# EAGLE board COMP_PULSE-SIEM_V2_02 (EAGLE 9.5.1)
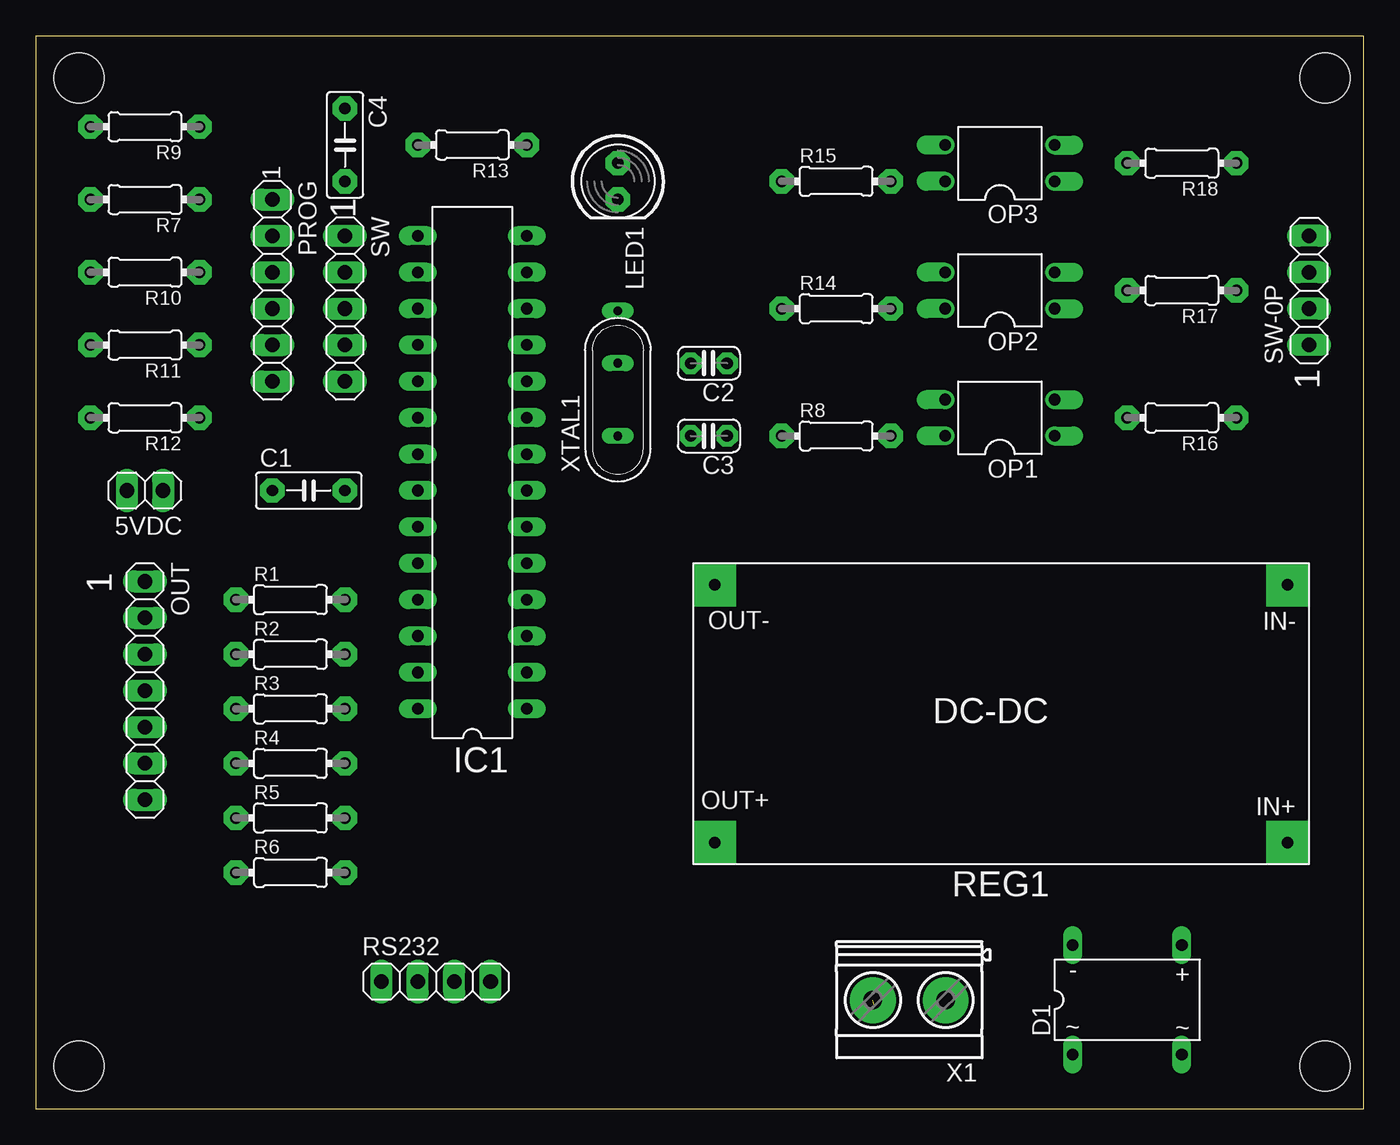
[diagram p0: board, top side]
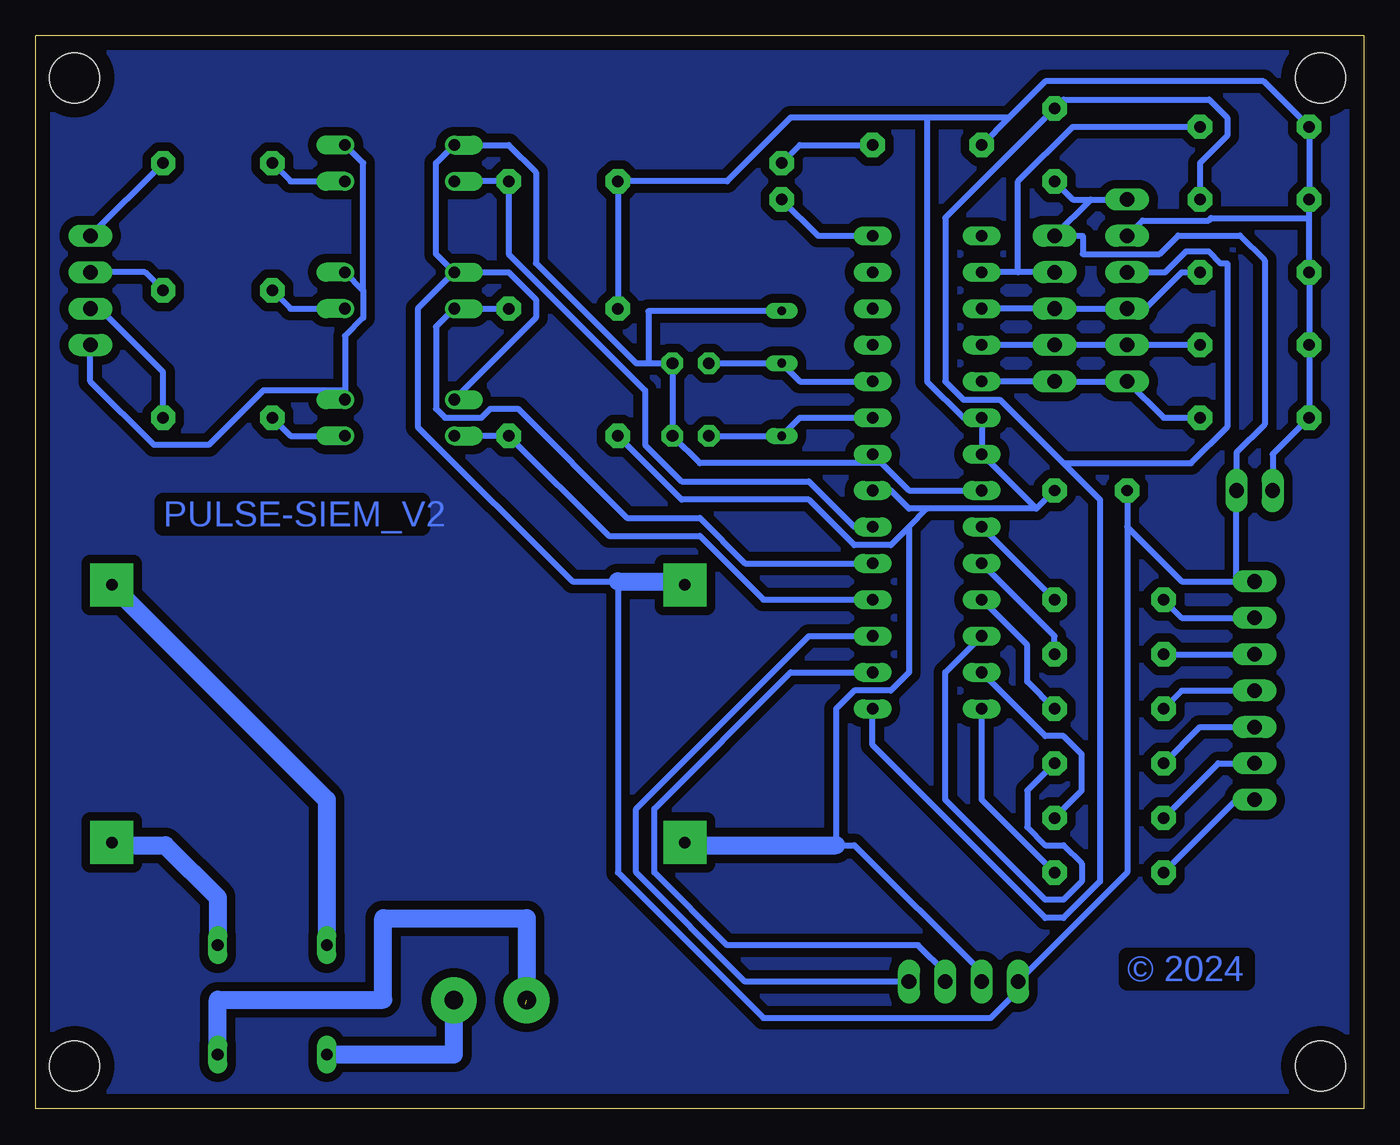
[diagram p1: board, bottom side, seen from below]

Size 92.71 x 74.93 mm. Coordinates in mm from the lower left corner, seen from the top.
Outline: 0.01,74.6 0.01,0 92.71,0 92.71,74.93 0,74.93 0,73.66
Copper layers (1*16): Top 0.035mm / dielectric 1.5mm / Bottom 0.035mm
Design rules "default *": minimum track width 16mil, minimum drill 0.35mm, track to track 16mil, track to pad 16mil, pad to pad 16mil, via to via 16mil, smd to smd 16mil, copper to edge 40mil, drill to drill 16mil, minimum pad ring 10mil, minimum via ring 8mil, stop-mask expansion 4mil, vias tented up to drill 0mil, thermal gap 16mil
Holes 3.5 mm at 3,72 90,72 90,3 3,3

## Footprints (pad centres in the part's own frame; a part is rotated, then mirrored left to right if it is on the bottom)
1X02 = drill 1.016 long: 1 -1.27,0; 2 1.27,0
C050-025X075 = drill 0.8 pad 1.7 octagon: 1 -2.54,0; 2 2.54,0
C25-024X044 = drill 0.813 pad 1.5 octagon: 1 -1.27,0; 2 1.27,0
S1WBS80 = drill 0.813 long: + 3.81,3.81; - -3.81,3.81; ~ -3.81,-3.81; ~~ 3.81,-3.81
DIL28-3 = drill 0.813 long: 1 -16.51,-3.81; 2 -13.97,-3.81; 3 -11.43,-3.81; 4 -8.89,-3.81; 5 -6.35,-3.81; 6 -3.81,-3.81; 7 -1.27,-3.81; 8 1.27,-3.81; 9 3.81,-3.81; 10 6.35,-3.81; 11 8.89,-3.81; 12 11.43,-3.81; 13 13.97,-3.81; 14 16.51,-3.81; 15 16.51,3.81; 16 13.97,3.81; 17 11.43,3.81; 18 8.89,3.81; 19 6.35,3.81; 20 3.81,3.81; 21 1.27,3.81; 22 -1.27,3.81; 23 -3.81,3.81; 24 -6.35,3.81; 25 -8.89,3.81; 26 -11.43,3.81; 27 -13.97,3.81; 28 -16.51,3.81
LED_5MM = drill 0.8 pad 1.7 octagon: A -1.27,0; K 1.27,0
DIL04 = drill 0.813 offset: 1 -1.27,-3.81; 2 1.27,-3.81; 3 1.27,3.81; 4 -1.27,3.81
1X07 = drill 1.016 long: 1 -7.62,0; 2 -5.08,0; 3 -2.54,0; 4 0,0; 5 2.54,0; 6 5.08,0; 7 7.62,0
ICSP-AVR-6-PIN = drill 1.016 long: 1 -6.35,0; 2 -3.81,0; 3 -1.27,0; 4 1.27,0; 5 3.81,0; 6 6.35,0
RESISTOR_1/4_7.5 = drill 0.8 pad 1.7 octagon: 1 -3.81,0; 2 3.81,0
LM2596_DC-DC_HW-411 = drill 0.813 pad 3 square: 1 1.5,19.5; 2 1.5,1.5; 3 41.5,19.5; 4 41.5,1.5
1X04 = drill 1.016 long: 1 -3.81,0; 2 -1.27,0; 3 1.27,0; 4 3.81,0
1X05 = drill 1.016 long: 1 -5.08,0; 2 -2.54,0; 3 0,0; 4 2.54,0; 5 5.08,0
MKDSN1,5/2-5,08 = drill 1.3 pad 3.2: 1 -2.561,0.025; 2 2.519,0.025
QS = drill 0.61 long: 1 -2.54,0; 2 2.54,0; GND 6.2,0

## Placement (x,y rotation side)
5VDC  [1X02]  7.62,43.18 180 top
C1  100nf  [C050-025X075]  19.05,43.18 0 top
C2  22pf  [C25-024X044]  46.99,52.07 180 top
C3  22pf  [C25-024X044]  46.99,46.99 180 top
C4  10nf  [C050-025X075]  21.59,67.31 270 top
D1  [S1WBS80]  76.2,7.62 0 top
IC1  ATMEGA328P  [DIL28-3]  30.48,44.45 90 top
LED1  [LED_5MM]  40.64,64.77 270 top
OP1  PC817  [DIL04]  67.31,48.26 90 top
OP2  PC817  [DIL04]  67.31,57.15 90 top
OP3  PC817  [DIL04]  67.31,66.04 90 top
OUT  [1X07]  7.62,29.21 270 top
PROG  [ICSP-AVR-6-PIN]  16.51,57.15 270 top
R1  220R  [RESISTOR_1/4_7.5]  17.78,35.56 0 top
R2  220R  [RESISTOR_1/4_7.5]  17.78,31.75 0 top
R3  220R  [RESISTOR_1/4_7.5]  17.78,27.94 0 top
R4  220R  [RESISTOR_1/4_7.5]  17.78,24.13 0 top
R5  220R  [RESISTOR_1/4_7.5]  17.78,20.32 0 top
R6  220R  [RESISTOR_1/4_7.5]  17.78,16.51 0 top
R7  10K  [RESISTOR_1/4_7.5]  7.62,63.5 180 top
R8  10K  [RESISTOR_1/4_7.5]  55.88,46.99 0 top
R9  10K  [RESISTOR_1/4_7.5]  7.62,68.58 180 top
R10  10K  [RESISTOR_1/4_7.5]  7.62,58.42 180 top
R11  10K  [RESISTOR_1/4_7.5]  7.62,53.34 180 top
R12  10K  [RESISTOR_1/4_7.5]  7.62,48.26 180 top
R13  1K  [RESISTOR_1/4_7.5]  30.48,67.31 180 top
R14  10K  [RESISTOR_1/4_7.5]  55.88,55.88 0 top
R15  10K  [RESISTOR_1/4_7.5]  55.88,64.77 0 top
R16  220R  [RESISTOR_1/4_7.5]  80.01,48.26 180 top
R17  220R  [RESISTOR_1/4_7.5]  80.01,57.15 180 top
R18  220R  [RESISTOR_1/4_7.5]  80.01,66.04 180 top
REG1  [LM2596_DC-DC_HW-411]  88.9,38.1 180 top
RS232  [1X04]  27.94,8.89 0 top
SW  [1X05]  21.59,55.88 270 top
SW-0P  [1X04]  88.9,57.15 90 top
X1  24VDC  [MKDSN1,5/2-5,08]  60.96,7.62 180 top
XTAL1  20MHZ  [QS]  40.64,49.53 90 top

## Library data of the parts
5VDC OUT RS232 SW SW-0P = pinhead
C1-C4 D1 LED1 PROG R1-R18 REG1 X1 XTAL1 = 00-tecnicosotv
IC1 = atmega8
OP1-OP3 = optocoupler; MPN: PC817X4J000F; OC_FARNELL: 9707727; OC_NEWARK: 97K7059

## Nets
1L1+: OUT.2 R1.1
1L1-: OUT.3 R2.1
1L2+: OUT.4 R3.1
1L2-: OUT.5 R4.1
1L3+: OUT.6 R5.1
1L3-: OUT.7 R6.1
+5V: 5VDC.2 C1.2 IC1.7 IC1.20 IC1.21 PROG.2 R7.2 R8.1 R9.2 R10.2 R11.2 R12.2 R13.2 R14.1 R15.1 REG1.3 RS232.2
GND: 5VDC.1 C1.1 C2.1 C3.1 C4.2 IC1.8 IC1.22 OP1.3 OP2.3 OP3.3 OUT.1 PROG.1 REG1.4 RS232.1 SW.1
GND.: OP1.2 OP2.2 OP3.2 SW-0P.1
N$1: IC1.4 OP1.4 R8.2
N$2: IC1.5 OP2.4 R14.2
N$3: IC1.6 OP3.4 R15.2
N$4: OP1.1 R16.2
N$5: OP2.1 R17.2
N$6: OP3.1 R18.2
N$9: C2.2 IC1.10 XTAL1.2
N$10: C4.1 IC1.1 PROG.3 R7.1
N$12: C3.2 IC1.9 XTAL1.1
N$17: IC1.23 R1.2
N$18: IC1.24 R2.2
N$19: IC1.25 R3.2
N$20: IC1.26 R4.2
N$21: IC1.27 R5.2
N$22: IC1.28 R6.2
N$26: IC1.14 LED1.K
N$27: LED1.A R13.1
N$33: D1.~ X1.1
N$34: D1.~~ X1.2
N$35: D1.- REG1.2
N$36: D1.+ REG1.1
RX: IC1.2 RS232.3
S1: IC1.16 R9.1 SW.2
S2: IC1.17 PROG.4 R10.1 SW.3
S3: IC1.18 PROG.5 R11.1 SW.4
S4: IC1.19 PROG.6 R12.1 SW.5
SW1: R16.1 SW-0P.2
SW2: R17.1 SW-0P.3
SW3: R18.1 SW-0P.4
TX: IC1.3 RS232.4

## Tracks (layer width: path | path; a pad name or v marks a point on that pad's centre or on a via)
1L1+
  Bottom 0.406: OUT.2 12.7,34.29 R1.1
1L1-
  Bottom 0.406: R2.1 OUT.3
1L2+
  Bottom 0.406: OUT.4 12.7,29.21 R3.1
1L2-
  Bottom 0.406: OUT.5 11.43,26.67 R4.1
1L3+
  Bottom 0.406: OUT.6 10.16,24.13 R5.1
1L3-
  Bottom 0.406: OUT.7 8.89,21.59 R6.1
+5V
  Bottom 0.406: RS232.2 26.67,9.53 35.56,18.41 36.83,18.41 36.83,27.94 35.56,29.21 33.02,29.21 31.75,30.48 31.75,40.64 | 46.99,18.41 REG1.3 | IC1.7 33.02,43.18 31.75,41.91 30.48,41.91 | 22.86,41.91 30.48,41.91 | C1.2 22.86,41.91 | R8.1 47.62,42.55 38.73,42.55 35.56,39.37 33.02,39.37 31.75,40.64 | 30.48,41.91 31.75,40.64 | 22.86,41.91 IC1.21 IC1.20 27.94,48.26 30.48,50.8 30.48,69.22 | 5VDC.2 6.35,45.72 R12.2 R11.2 R10.2 3.81,62.2 | R14.1 R15.1 44.45,64.77 40.01,69.22 30.48,69.22 | 24.77,69.22 22.23,71.75 6.99,71.75 R9.2 R7.2 3.81,62.2 | 24.77,69.22 R13.2 | 24.77,69.22 30.48,69.22 | 3.81,62.2 10.66,62.2 10.82,62.04 15.43,62.04 PROG.2
  Bottom 1.27: 46.99,18.41 36.83,18.41
ABCDE
  pour Bottom (isolate 0.61): 0,0 0,74.93 92.71,74.93 92.71,0
GND
  Bottom 0.406: C1.1 16.51,40.64 | 16.51,40.64 16.51,16.51 RS232.1 24.13,8.26 26.04,6.35 41.91,6.35 52.07,16.51 52.07,36.83 55.24,36.83 66.04,47.62 66.04,55.88 OP2.3 | 8.89,36.83 12.7,36.83 16.51,40.64 | 8.89,36.83 8.89,42.98 5VDC.1 8.89,45.82 6.91,47.8 6.91,59.26 8.64,60.98 12.95,60.98 14.25,59.69 19.61,59.69 19.61,60.96 SW.1 19.05,63.5 | 8.89,36.83 OUT.1 | IC1.22 31.75,43.18 33.66,45.09 | 33.66,45.09 46.35,45.09 C3.1 C2.1 50.8,52.07 57.78,59.05 57.78,65.41 59.69,67.31 OP3.3 64.77,66.04 64.77,59.69 OP2.3 | 33.66,45.09 IC1.8 | OP1.3 57.78,55.24 57.78,56.52 59.69,58.42 OP2.3 | 47.62,36.83 REG1.4 | 19.05,63.5 20.32,63.5 C4.2 | 19.05,63.5 PROG.1
  Bottom 1.27: 52.07,36.83 47.62,36.83
GND.
  Bottom 0.406: 71.12,50.16 71.12,53.98 69.85,55.24 69.85,57.15 | OP2.2 69.85,57.15 | OP3.2 69.85,66.04 69.85,57.15 | SW-0P.1 88.9,50.8 84.45,46.35 80.64,46.35 76.83,50.16 71.12,50.16 | 71.12,50.16 OP1.2
N$1
  Bottom 0.406: IC1.4 41.91,35.56 46.35,40.01 52.7,40.01 R8.2 OP1.4
N$2
  Bottom 0.406: IC1.5 43.18,38.1 46.35,41.27 51.44,41.27 59.05,48.9 60.96,48.9 61.59,48.26 64.14,48.26 64.77,48.9 64.77,54.61 OP2.4 R14.2
N$3
  Bottom 0.406: IC1.6 35.56,40.64 38.73,43.81 47.62,43.81 50.16,46.35 50.16,50.16 59.69,59.69 R15.2 OP3.4
N$4
  Bottom 0.406: OP1.1 74.93,46.99 R16.2
N$5
  Bottom 0.406: OP2.1 74.93,55.88 R17.2
N$6
  Bottom 0.406: OP3.1 74.93,64.77 R18.2
N$9
  Bottom 0.406: C2.2 XTAL1.2 39.37,50.8 IC1.10
N$10
  Bottom 0.406: IC1.1 34.29,25.4 22.23,13.34 20.95,13.34 18.41,15.88 18.41,42.55 20.95,45.09 | 20.95,45.09 25.4,49.53 27.94,49.53 29.21,50.8 29.21,62.23 C4.1 20.95,70.48 10.79,70.48 9.53,69.22 9.53,67.94 11.43,66.04 R7.1 | 20.95,45.09 12.06,45.09 9.53,47.62 9.53,59.05 10,59.05 10.82,59.88 12.39,59.88 13.85,58.42 PROG.3
N$12
  Bottom 0.406: C3.2 XTAL1.1 39.37,48.26 IC1.9
N$17
  Bottom 0.406: R1.2 IC1.23
N$18
  Bottom 0.406: IC1.24 21.59,33.02 R2.2
N$19
  Bottom 0.406: IC1.25 23.5,32.38 23.5,29.84 R3.2
N$20
  Bottom 0.406: IC1.26 29.21,30.48 29.21,21.59 22.23,14.61 20.95,14.61 19.68,15.88 19.68,17.14 20.95,18.41 22.23,18.41 23.5,19.68 23.5,22.23 R4.2
N$21
  Bottom 0.406: IC1.27 22.23,26.04 20.95,26.04 19.68,24.77 19.68,22.23 R5.2
N$22
  Bottom 0.406: IC1.28 26.67,21.59 R6.2
N$26
  Bottom 0.406: IC1.14 38.1,60.96 LED1.K
N$27
  Bottom 0.406: R13.1 39.37,67.31 LED1.A
N$33
  Bottom 1.27: D1.~ 63.52,3.81 X1.1
N$34  (1 unrouted)
  Bottom 1.27: D1.~~ 80.01,7.62 68.45,7.62 68.45,13.31 58.45,13.31 58.45,7.11 58.52,7.11 58.52,7.32
N$35
  Bottom 1.27: REG1.2 72.39,21.59 D1.-
N$36
  Bottom 0.406: REG1.1 87,18.41
  Bottom 1.27: 87,18.41 83.67,18.41 80.01,14.76 D1.+
RX
  Bottom 0.406: IC1.2 40.01,30.48 49.53,20.95 49.53,16.51 44.45,11.43 31.11,11.43 29.21,9.53 RS232.3
S1
  Bottom 0.406: SW.2 24.13,58.42 | 24.13,58.42 IC1.16 | R9.1 20.32,68.58 24.13,64.77 24.13,58.42
S2
  Bottom 0.406: IC1.17 SW.3 PROG.4 15.24,55.88 12.7,58.42 R10.1
S3
  Bottom 0.406: IC1.18 SW.4 PROG.5 R11.1
S4
  Bottom 0.406: IC1.19 SW.5 PROG.6 13.97,48.26 R12.1
S$1
  Bottom 0.406: 40.69,55.7 49.94,55.7 49.94,52.09
SW1
  Bottom 0.406: SW-0P.2 88.27,55.88 83.82,51.44 R16.1
SW2
  Bottom 0.406: SW-0P.3 85.09,58.42 R17.1
SW3
  Bottom 0.406: R18.1 SW-0P.4
TX
  Bottom 0.406: IC1.3 38.73,33.02 50.8,20.95 50.8,16.51 43.18,8.89 RS232.4

## Text on the board
Bottom: PULSE-SIEM_V2 | © 2024
tPlace: 1 | 1 | 1